# Allegro board 7SEG.brd
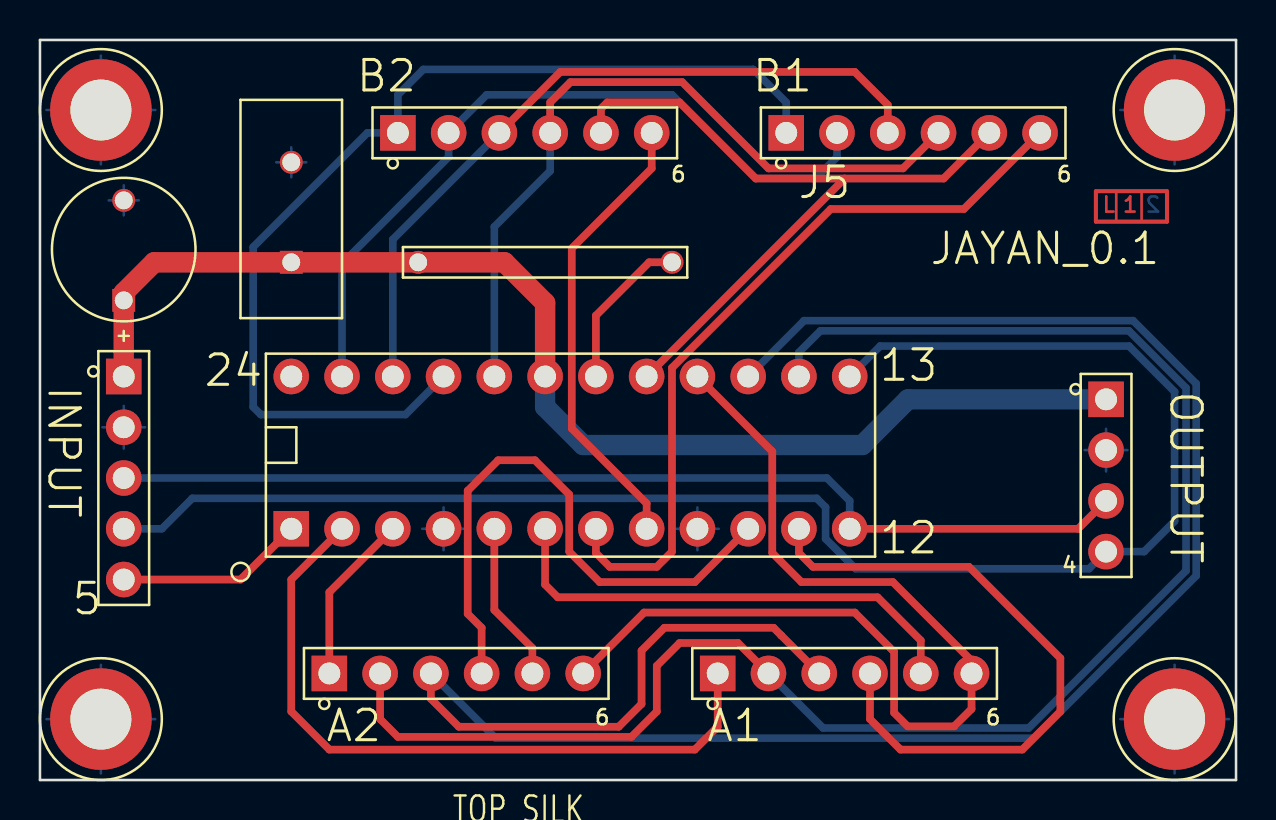
[diagram p0: board, top side]
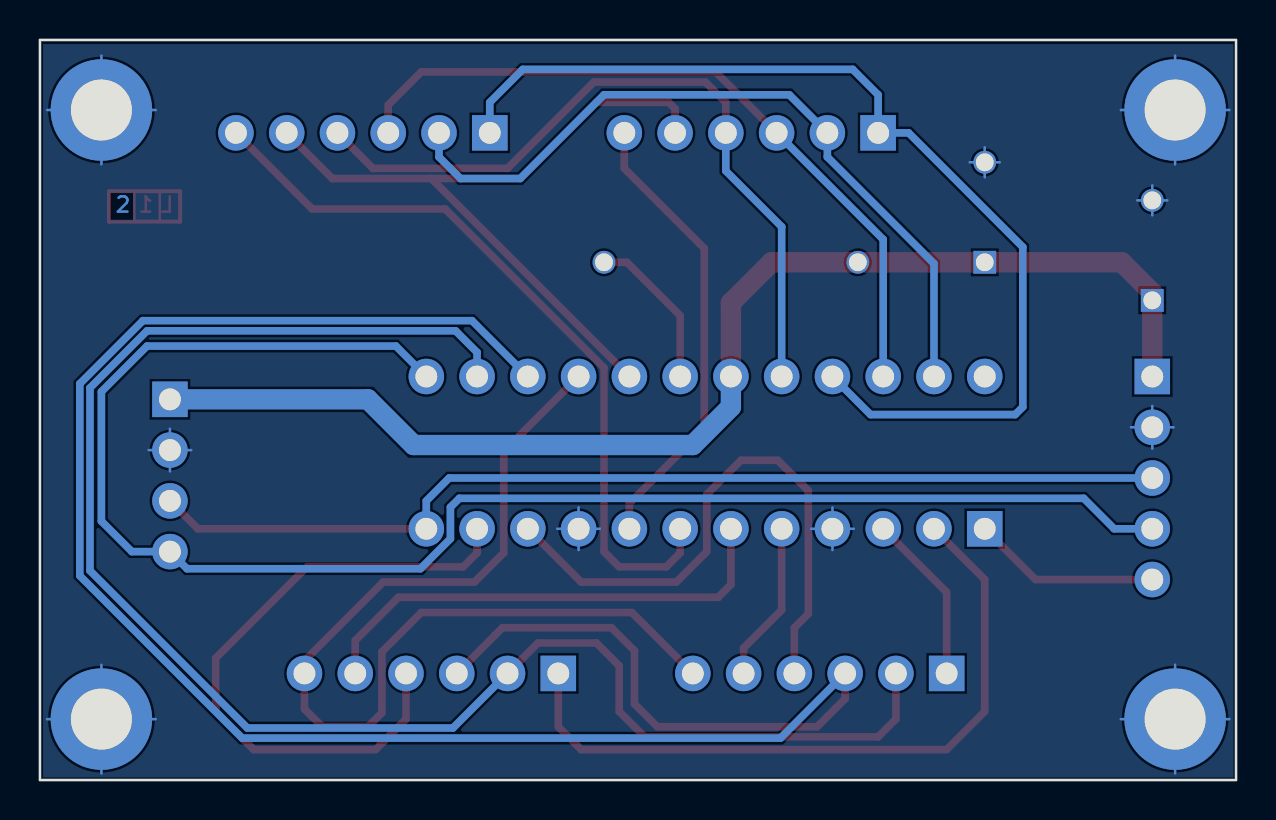
[diagram p1: board, bottom side, seen from below]

Outline 59.84 x 37.03 mm; copper layers: TOP, BOTTOM. Coordinates in mm from the lower left corner of the outline.
Outline path: 0,37.03 0,0 59.84,0 59.84,37.03 0,37.03

## Placement (name value [footprint] x y rotation side)
C1  10uF  [CAP_197X31_P]  4.19 24 90 top
C2  100nF  [CAP_197X31_N]  12.57 25.91 90 top
J1  MAX7219_MAXIM_SOCKET  [TH_1200X400_24DIP]  12.57 12.57 0 top
J2  HEADER_5PIN_INPUT  [HEADER_1X5]  4.19 20.19 270 top
J3  HEADER_4PIN_OUTPUT  [HEADER_1X4]  53.34 19.05 270 top
J4  HEADER_6PIN_1A  [HEADER_1X6]  33.91 5.33 0 top
J5  HEADER_6PIN_1B  [HEADER_1X6]  37.34 32.38 0 top
J6  HEADER_6PIN_2A  [HEADER_1X6]  14.48 5.33 0 top
J7  HEADER_6PIN_2B  [HEADER_1X6]  17.91 32.38 0 top
MH1  HEADER 1  [MH120]  3.05 33.53 0 top
MH2  HEADER 1  [MH120]  56.77 33.53 0 top
MH3  HEADER 1  [MH120]  3.05 3.05 0 top
MH4  HEADER 1  [MH120]  56.77 3.05 0 top
NOREF  -  []  0 0 0 top
NOREF#2  -  []  0 0 90 top
R1  40k  [TH_1909X31_2DIP]  31.62 25.91 180 top

## Library data of the parts
C1 = CAP
C2 = CAP NP
J1 = MAX7219_MAXIM_SOCKET_0
J2 = HEADER_5PIN_INPUT
J3 = HEADER_4PIN_OUTPUT
J4 = HEADER_6PIN_1A
J5 = HEADER_6PIN_1B
J6 = HEADER_6PIN_2A
J7 = HEADER_6PIN_2B
MH1-MH4 = HEADER 1
R1 = R

## Footprints (pads in the part's own frame, mm; a bottom-side part is the same pattern mirrored in y, then rotated)
CAP_197X31_N
  rect 1.143x1.143 hole 0.889: 1(0,0)
  round 1.143 hole 0.889: 2(5.004,0)
CAP_197X31_P
  rect 1.143x1.143 hole 0.889: 1(0,0)
  round 1.143 hole 0.889: 2(5.004,0)
HEADER_1X4
  rect 1.778x1.778 hole 1.092: 1(0,0)
  round 1.778 hole 1.092: 2(2.54,0) 3(5.08,0) 4(7.62,0)
HEADER_1X5
  rect 1.778x1.778 hole 1.092: 1(0,0)
  round 1.778 hole 1.092: 2(2.54,0) 3(5.08,0) 4(7.62,0) 5(10.16,0)
HEADER_1X6
  rect 1.778x1.778 hole 1.092: 1(0,0)
  round 1.778 hole 1.092: 2(2.54,0) 3(5.08,0) 4(7.62,0) 5(10.16,0) 6(12.7,0)
MH120
  round 5.08 hole 3.048: 1(0,0)
TH_1200X400_24DIP
  rect 1.778x1.778 hole 1.092: 1(0,0)
  round 1.778 hole 1.092: 2(2.54,0) 3(5.08,0) 4(7.62,0) 5(10.16,0) 6(12.7,0) 7(15.24,0) 8(17.78,0) 9(20.32,0) 10(22.86,0) 11(25.4,0) 12(27.94,0) 13(27.94,7.62) 14(25.4,7.62) 15(22.86,7.62) 16(20.32,7.62) 17(17.78,7.62) 18(15.24,7.62) 19(12.7,7.62) 20(10.16,7.62) 21(7.62,7.62) 22(5.08,7.62) 23(2.54,7.62) 24(0,7.62)
TH_1909X31_2DIP
  round 1.143 hole 0.889: 1(0,0) 2(12.7,0)

## Nets
GND: C1.2 C2.2 J1.4(GND1) J1.9(GND2) J2.2(GND) J3.2(GND) MH1.1 MH2.1 MH3.1 MH4.1
VCC_5V: C1.1 C2.1 J1.19(V+) J2.1(VCC) J3.1(VCC) R1.2
CLK: J1.13(CLK) J2.4(CLOCK) J3.4(CLOCK)
CS#: J1.12(LOAD/CS#) J2.3(LOAD) J3.3(LOAD)
D1: J1.11(DIG1) J4.4(D1)
D2: J1.6(DIG2) J4.5(D2)
D3: J1.7(DIG3) J5.6(D3)
D4: J1.3(DIG4) J6.1(D4)
D5: J1.10(DIG5) J6.4(D5)
D6: J1.5(DIG6) J6.5(D6)
D7: J1.8(DIG7) J7.6(D7)
DIN: J1.1(DIN) J2.5(DIN)
DO: J1.2(DIG0) J4.1(D0)
ISET: J1.18(ISET) R1.1
SEG_A: J1.14(SEG_A) J4.2(A) J6.2(A)
SEG_B: J1.16(SEG_B) J4.6(B) J6.6(B)
SEG_C: J1.20(SEG_C) J5.4(C) J7.4(C)
SEG_D: J1.23(SEG_D) J5.2(D) J7.2(D)
SEG_DP: J1.22(SEG_DP) J5.3(DP) J7.3(DP)
SEG_E: J1.21(SEG_E) J5.1(E) J7.1(E)
SEG_F: J1.15(SEG_F) J4.3(F) J6.3(F)
SEG_G: J1.17(SEG_G) J5.5(G) J7.5(G)

Pads without a net: J1 24

## Routing (per net, layer and track width the routed paths; a pad name or vN(x,y) marks a point on that pad's centre or on a via; arc(x,y) is an arc through that point)
GND: length 66.6
  BOTTOM w0.127: 3.12,17.65 4.19,17.65 ; 4.19,17.65 4.19,16.59 ; 4.19,17.65 4.19,18.72 ; 4.19,17.65 5.26,17.65 ; 32.89,11.51 J1.9 ; J1.9 33.96,12.57 ; J1.9 32.89,13.64 ; J1.9 31.83,12.57 ; C2.2 12.57,31.66 ; C2.2 11.82,30.91 ; C2.2 13.32,30.91 ; C2.2 12.57,30.16 ; MH1.1 5.77,33.53 ; MH1.1 3.05,36.25 ; MH1.1 0.33,33.53 ; MH1.1 3.05,30.81 ; 3.44,29.01 C1.2 ; C1.2 4.19,29.76 ; C1.2 4.94,29.01 ; C1.2 4.19,28.26 ; MH4.1 56.77,5.77 ; MH4.1 54.05,3.05 ; MH4.1 56.77,0.33 ; MH4.1 59.49,3.05 ; J3.2 54.41,16.51 ; J3.2 53.34,15.44 ; J3.2 52.27,16.51 ; J3.2 53.34,17.58 ; J1.4 21.26,12.57 ; J1.4 20.19,11.51 ; J1.4 19.13,12.57 ; J1.4 20.19,13.64 ; MH3.1 5.77,3.05 ; MH3.1 0.33,3.05 ; MH3.1 3.05,0.33 ; MH3.1 3.05,5.77 ; MH2.1 59.49,33.53 ; MH2.1 56.77,36.25 ; MH2.1 56.77,30.81 ; MH2.1 54.05,33.53
VCC_5V: length 61.8
  TOP w1.016: J1.19 25.27,23.88 23.24,25.91 R1.2 C2.1 5.71,25.91 4.19,24.38 C1.1 J2.1
  BOTTOM w1.016: J3.1 43.43,19.05 41.15,16.76 27.18,16.76 25.27,18.67 J1.19
CLK: length 80.9
  BOTTOM w0.381: J2.4 6.1,12.57 7.62,14.1 38.86,14.1 39.31,13.65 39.31,12.07 40.81,10.57 52.48,10.57 J3.4 55.24,11.43 56.77,12.95 56.77,19.43 54.48,21.72 42.04,21.72 40.51,20.19
CS#: length 51.6
  TOP w0.381: 40.51,12.57 51.94,12.57 J3.3
  BOTTOM w0.381: 40.51,12.57 40.51,13.97 39.37,15.11 4.19,15.11
D1: length 32.4
  TOP w0.381: J4.4 41.53,3.05 43.05,1.52 49.15,1.52 51.05,3.43 51.05,6.1 46.48,10.67 38.67,10.67 37.97,11.36 J1.11
D2: length 24.4
  TOP w0.381: J1.6 25.27,9.78 25.91,9.14 41.91,9.14 44.07,6.99 J4.5
D3: length 38.1
  TOP w0.381: 27.81,12.57 27.81,11.36 28.51,10.67 30.86,10.67 31.62,11.43 31.62,20.63 39.57,28.57 46.23,28.57 J5.6
D4: length 8.6
  TOP w0.381: J6.1 14.48,9.4 J1.3
D5: length 29.4
  TOP w0.381: J6.4 22.1,7.62 21.4,8.32 21.4,14.48 22.93,16 24.77,16 26.48,14.29 26.48,11.43 28,9.91 32.77,9.91 J1.10
D6: length 8
  TOP w0.381: J1.5 22.73,8.51 24.64,6.6 J6.5
D7: length 23
  TOP w0.381: J1.8 30.35,13.84 26.61,17.59 26.61,26.61 30.61,30.61 J7.6
DIN: length 9.4
  TOP w0.381: J1.1 10.03,10.03 4.19,10.03
DO: length 35.5
  TOP w0.381: J4.1 33.91,2.67 32.77,1.52 14.48,1.52 12.57,3.43 12.57,10.03 J1.2
ISET: length 8
  TOP w0.381: R1.1 30.48,25.91 27.81,23.24 27.81,20.19
SEG_A: length 82.6
  TOP w0.381: J6.2 17.02,3.05 17.91,2.16 29.59,2.16 30.86,3.43 30.86,5.71 32,6.86 34.92,6.86 J4.2
  BOTTOM w0.381: J4.2 39.18,2.6 49.47,2.6 57.34,10.48 57.34,19.62 54.48,22.48 39.05,22.48 37.97,21.4 J1.14
SEG_B: length 50.2
  TOP w0.381: J1.16 36.64,16.45 36.64,11.37 38.1,9.91 42.67,9.91 46.61,5.97 J4.6 46.61,3.56 45.74,2.68 43.42,2.68 42.74,3.37 42.74,6.41 40.77,8.38 30.23,8.38 J6.6
SEG_C: length 37.3
  TOP w0.381: J7.4 25.53,33.91 26.54,34.92 32.13,34.92 36.45,30.61 43.18,30.61 J5.4
  BOTTOM w0.381: J1.20 22.73,27.69 25.53,30.48 J7.4
SEG_D: length 38
  BOTTOM w0.381: J1.23 15.11,25.84 20.45,31.18 J7.2 22.35,34.29 31.62,34.29 35.81,30.1 38.8,30.1 39.88,31.18 J5.2
SEG_DP: length 37.2
  TOP w0.381: J5.3 42.42,33.78 40.77,35.43 26.04,35.43 J7.3
  BOTTOM w0.381: J7.3 17.65,27.05 J1.22
SEG_E: length 52.1
  BOTTOM w0.381: J5.1 37.34,33.91 35.69,35.56 19.18,35.56 17.91,34.29 J7.1 16.38,32.38 10.67,26.67 10.67,18.67 11.05,18.29 18.29,18.29 J1.21
SEG_F: length 103.3
  TOP w0.381: J4.3 37.09,7.24 37.09,7.24 36.71,7.62 31.24,7.62 30.1,6.47 30.1,3.81 28.96,2.67 20.95,2.67 19.56,4.06 J6.3
  BOTTOM w0.381: J6.3 22.8,2.1 49.72,2.1 57.85,10.22 57.85,19.83 54.69,22.99 38.23,22.99 J1.15
SEG_G: length 37.3
  TOP w0.381: J5.5 45.21,30.1 40.26,30.1 ; 40.26,30.1 J1.17 ; 40.26,30.1 35.81,30.1 32,33.91 28.38,33.91 28.07,33.59 J7.5

## Copper pours and planes (outline as drawn; the poured copper is in the pictures)
GND on BOTTOM: 0.13,0.13 0.13,36.83 59.69,36.83 59.69,0.13

## Text on the board
BOTTOM: 2 | LAYER 2 (BOTTOM VIEW)
User.Comments: TOP SOLDER MASK | 2 LAYER | NOTE : | ALL 15 Mil Track | 1) Board thickness 1.6mm. | 4) DRILL TOLERANCE : +/- 3 MILS | 2) Material FR4. | 3) SURFACE FINISH : | 5) IMPEDANCE CONTOL :NO | and 5 mils spacing. | HASL
TOP: L | 1 | LAYER 1 (TOP VIEW)
Ref Des/Assembly Top: TOP ASSEMBLY
Ref Des/Silkscreen Top: TOP SILK | A2 | B2 | A1 | B1 | JAYAN_0.1 | INPUT | OUTPUT
User.15: DRILL DRAWING (FAB NOTE) | FIGURE | SIZE | 35.0 | 43.0 | 120.0 | DRILL CHART: TOP to BOTTOM | ALL UNITS ARE IN MILS | PLATED | QTY | 6 | 57 | 4
